# Altium PCB NEW_PCB_2025-04-07.pcbdoc
Units mil, origin at the board's own origin, x right, y up, seen from the top; angles counter-clockwise.
Board outline 4947 x 4947 mil, 2 copper layers (Top Layer, Bottom Layer); 1 components, 0 nets, 6 pads, 0 vias.
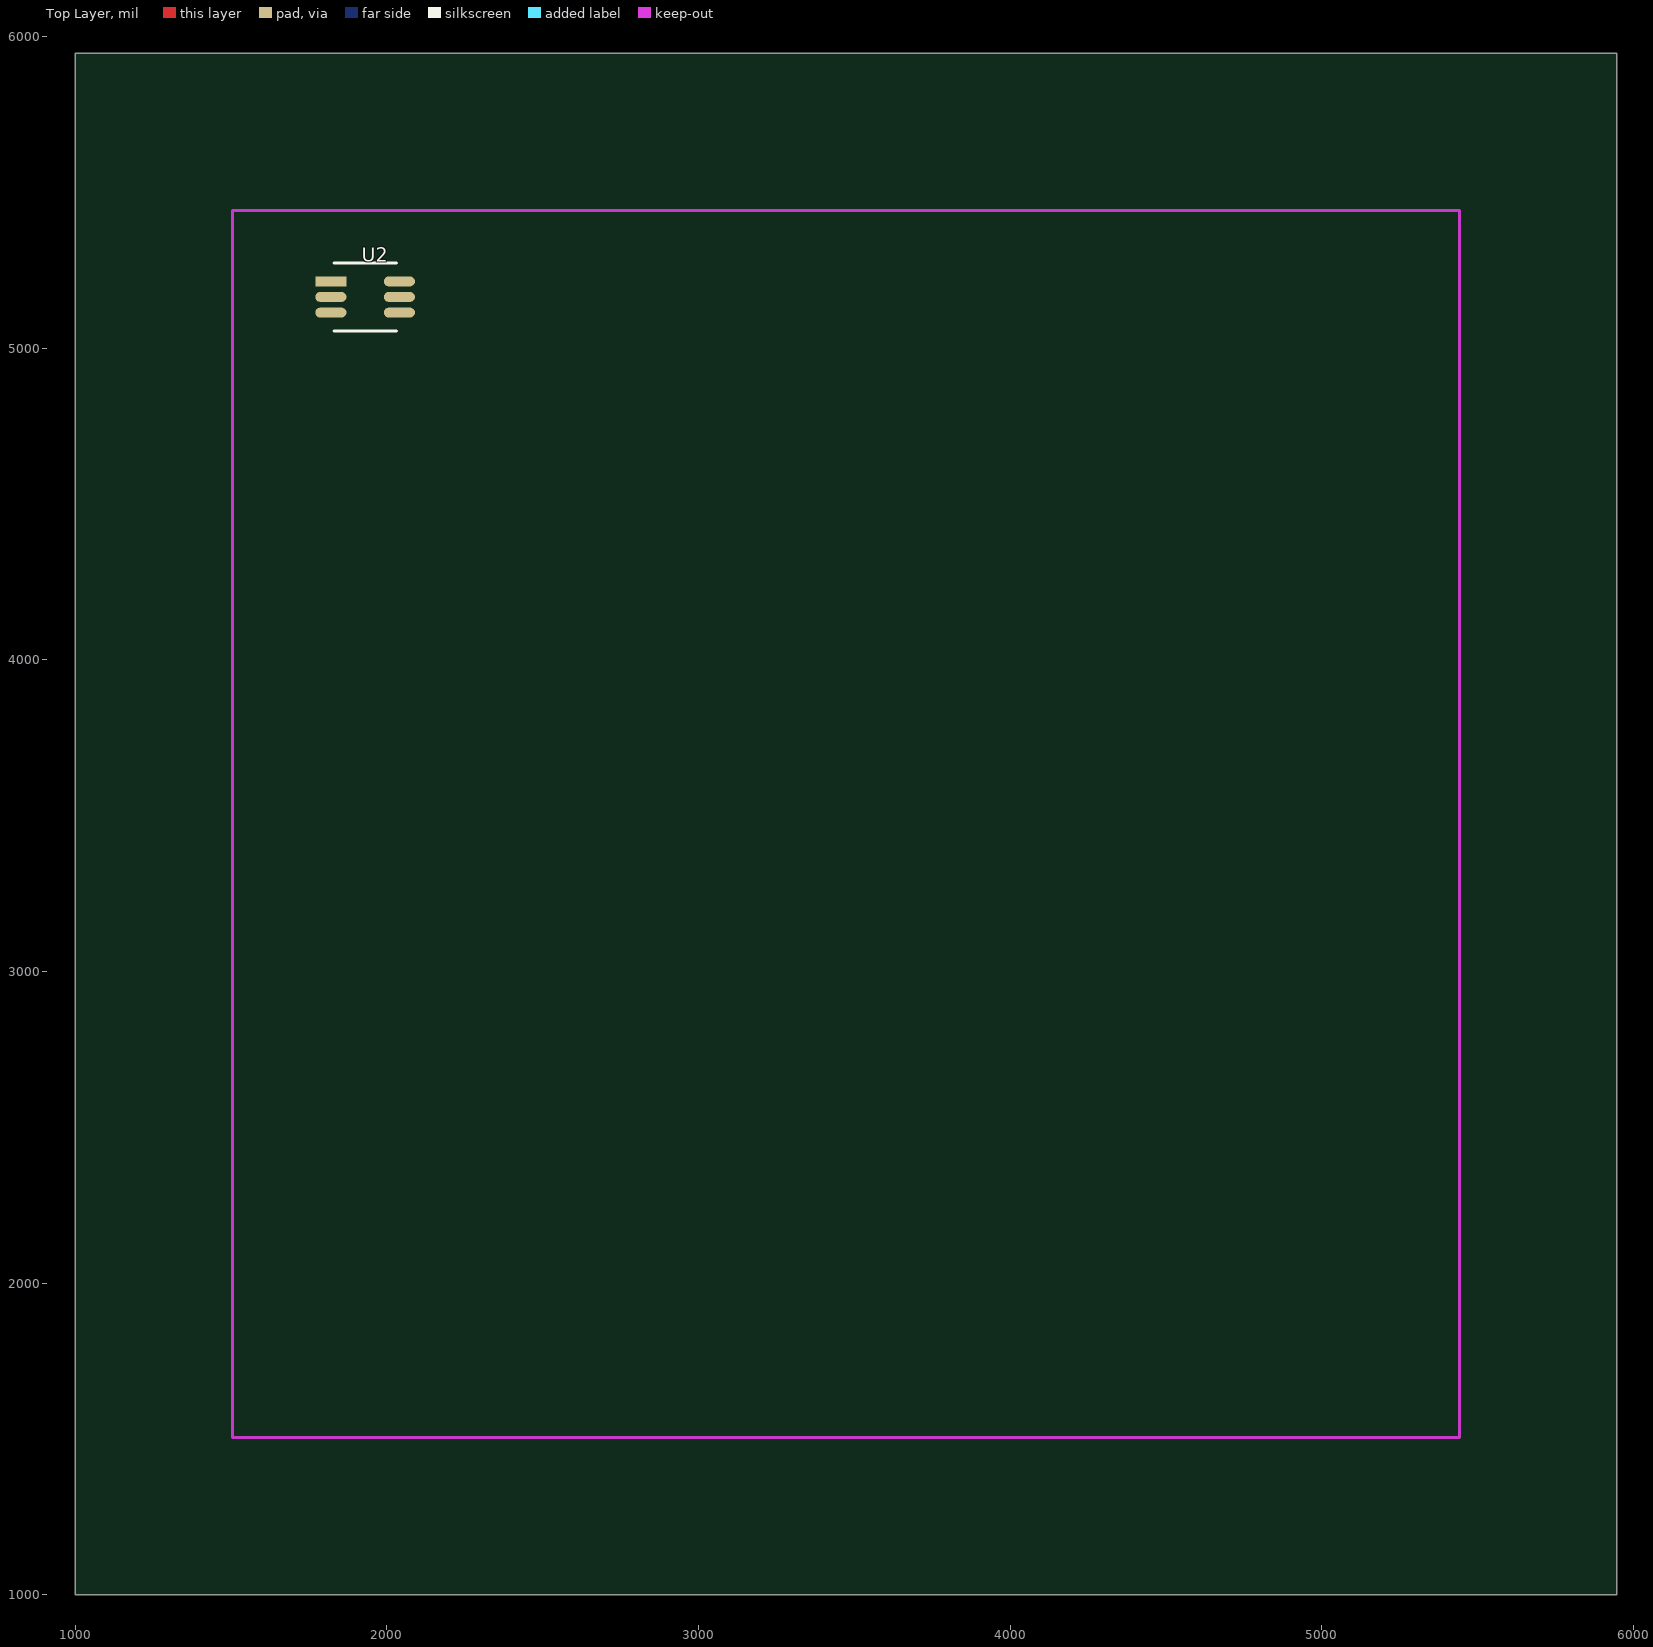
[diagram p0: Top Layer view]
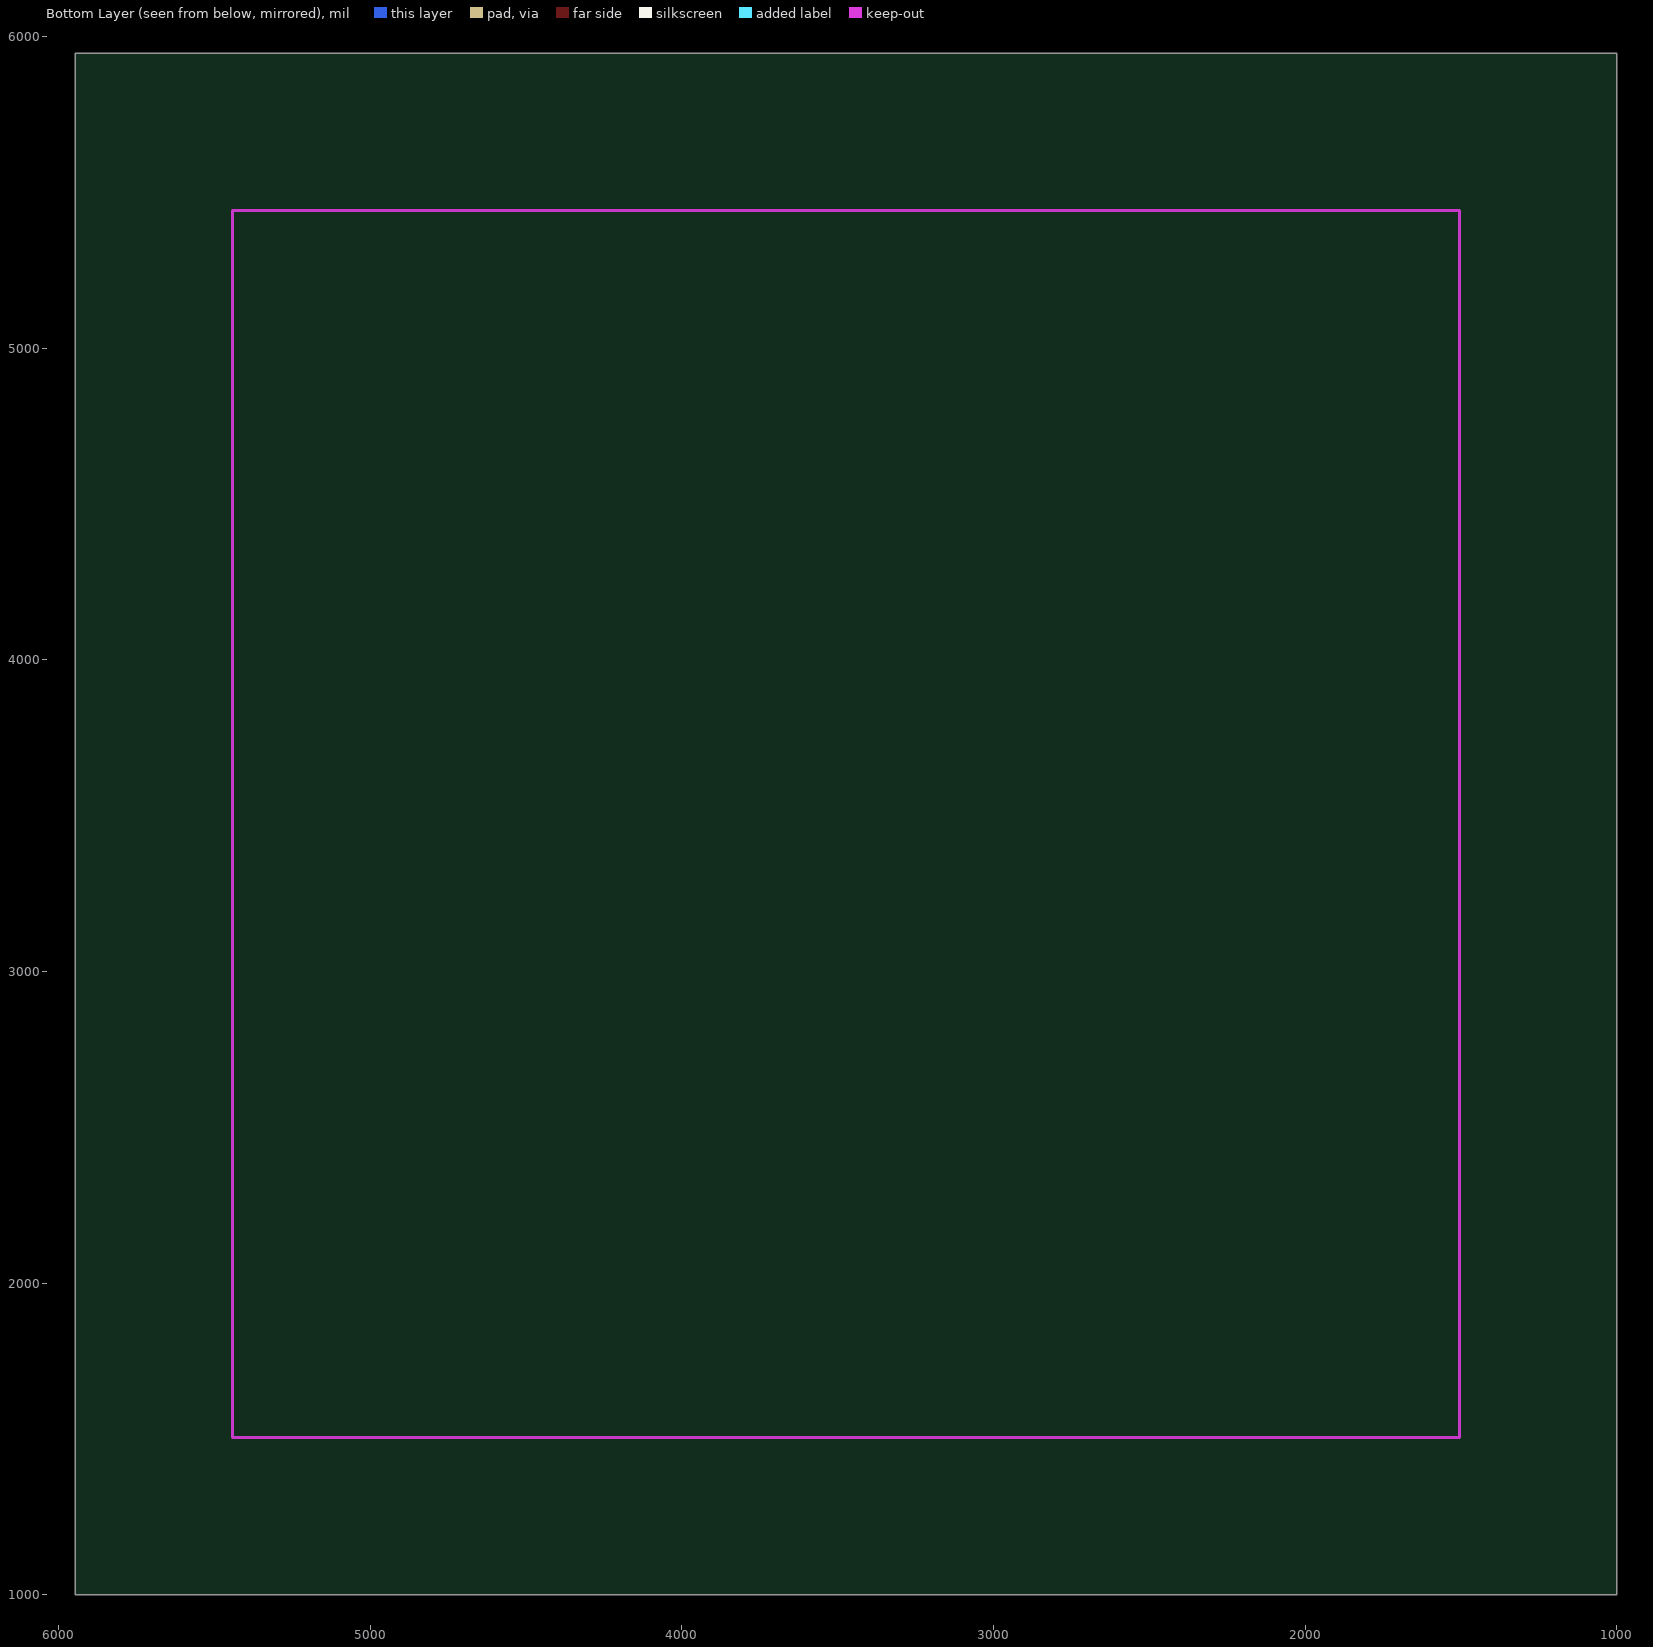
[diagram p1: Bottom Layer view, seen from below]

## Layer stack, top to bottom
Top Layer: signal copper (thickness not stored)
Dielectric: dielectric 12.6, FR-4, Dk 4.8
Bottom Layer: signal copper (thickness not stored)

## Board outline
5947,1000 1000,1000 1000,5947 5947,5947

## Components (designator, comment, footprint, x,y, rotation, side; value= is the part's Value field where it differs from the comment)
U2 "贴片2*3PIN-1.27MM排针" 贴片2*3PIN-1.27MM排针 1930,5170 r0 top

## Footprints (in the part's own frame and the unit in brackets; to place one, negate y for a bottom-side part, rotate by r counter-clockwise, add the part's x,y. Pads: shape width x height; smd on the part's side, far side on the other; paste and mask are expansions set on the pad)
贴片2*3PIN-1.27MM排针 [mil]
  rect 100x31.5 smd paste+0 mask+4: 1(-110,45)
  oval 100x31.5 smd paste+0 mask+4: 2(110,45) 3(-110,-5) 4(110,-5) 5(-110,-55) 6(110,-55)
  silkscreen extent -100,-114 100,104

## Nets (pads, with @x,y where several pads share a name; then routed paths per layer and width w, separated by ;. In a path a pad name is that pad's centre, name@x,y a point inside that pad or via, vN(x,y) a via of type N, cw(c..) or ccw(c..) an arc to the next point about the centre after c; other vN are vias at no path point)
pads on no net: U2.1 U2.2 U2.3 U2.4 U2.5 U2.6

## Silkscreen, mask and mechanical layers (free items; w line width, h text height)
Document:
  lines w0.1: 3473.49,3473.49 3473.51,3473.51